# Altium PCB dipping.PcbDoc
Units mm, origin at the board's own origin, x right, y up, seen from the top; angles counter-clockwise.
Board outline 115 x 55.5 mm, 2 copper layers (Top Layer, Bottom Layer); 12 components, 20 nets, 188 pads, 4 vias.
Unrouted connection lines stored in the file: 13.
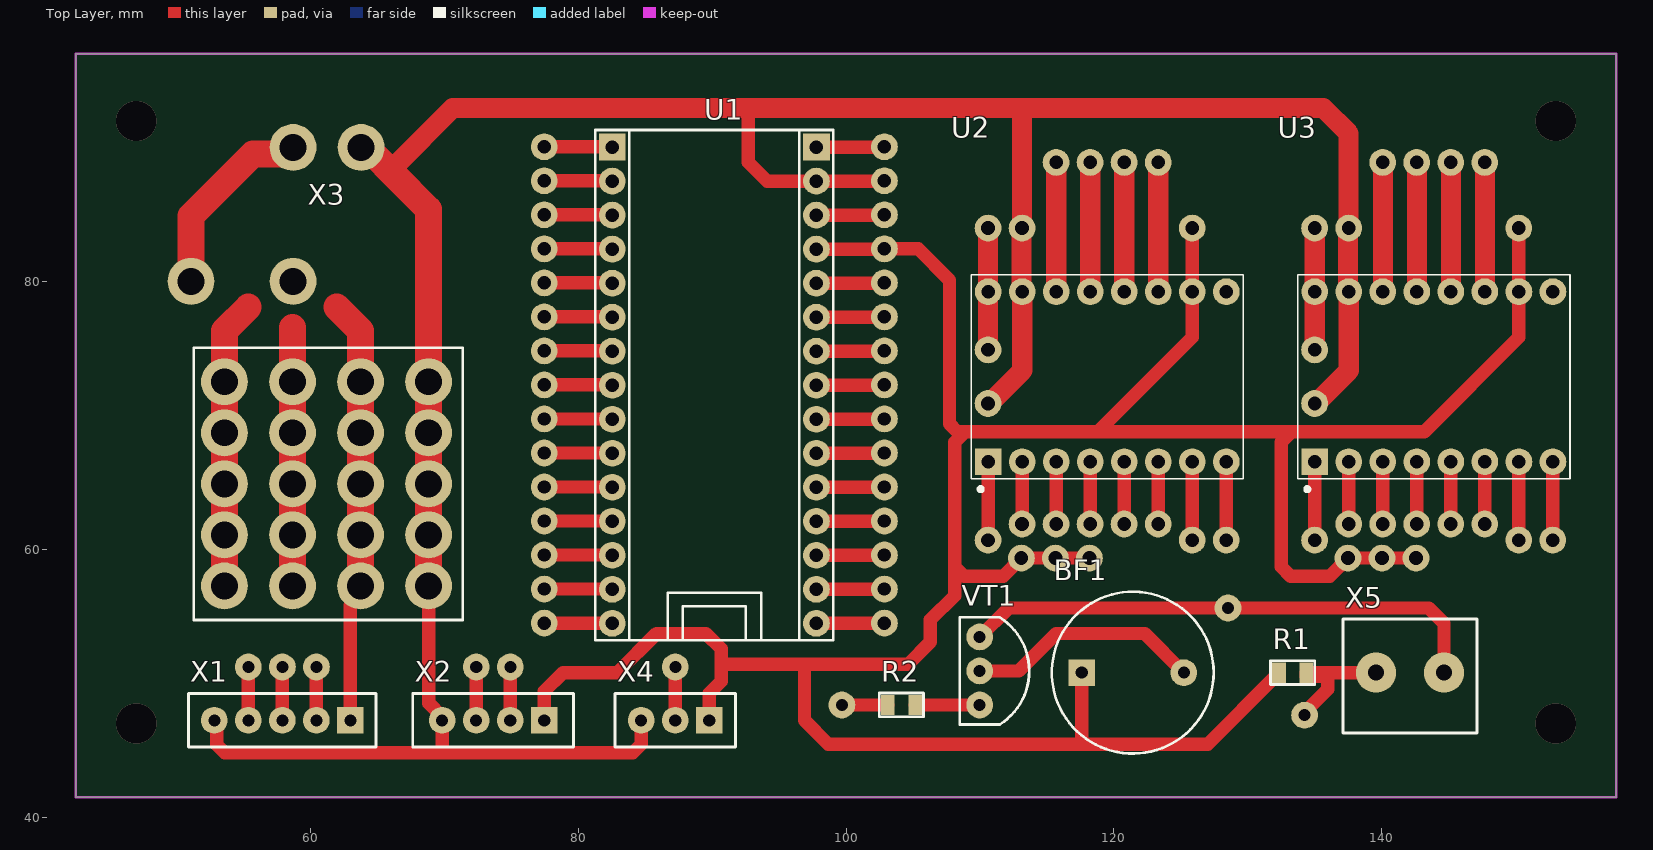
[diagram p0: Top Layer view]
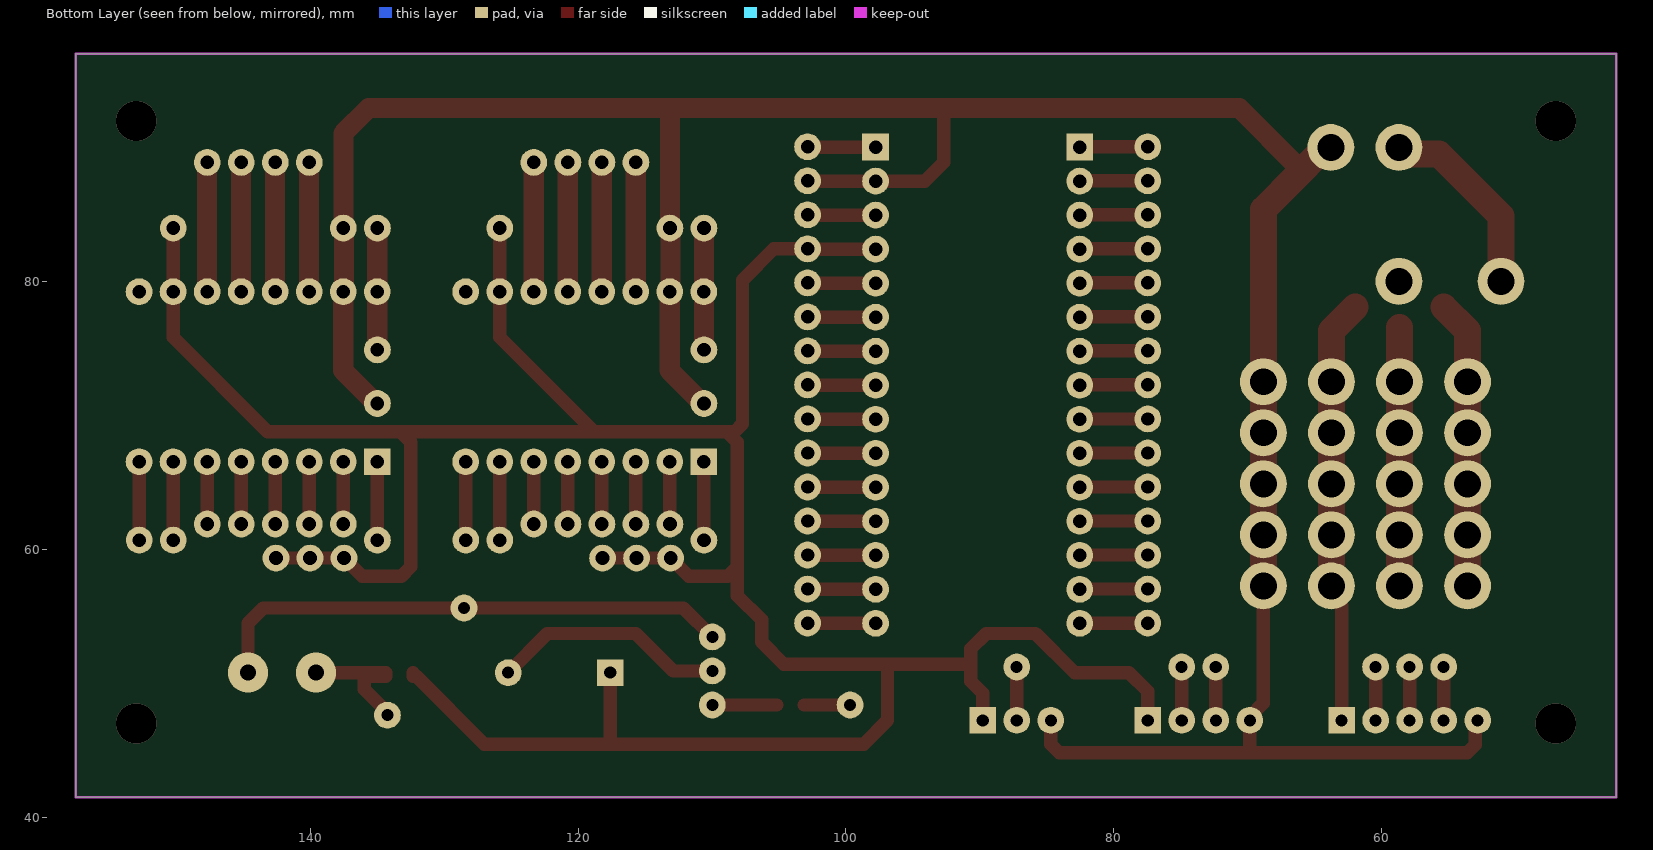
[diagram p1: Bottom Layer view, seen from below]

## Layer stack, top to bottom
Top Solder: solder mask 0.0102, Solder Resist, Dk 3.5
Top Layer: signal copper 0.0356
Dielectric 1: dielectric 0.32, FR-4, Dk 4.8
Bottom Layer: signal copper 0.0356
Bottom Solder: solder mask 0.0102, Solder Resist, Dk 3.5

## Board outline
42.5,41.5 157.5,41.5 157.5,97 42.5,97

## Design rules (kind name [scope] priority, off if disabled: settings)
Clearance [All] p1: gap=0.254 ignorepadtopadclearanceinfootprint=FALSE except(0: Arc-Hole Track-Hole SMDPad-Hole THPad-Hole Via-Hole Fill-Hole Poly-Hole Region-Hole Text-Hole)
PolygonConnect [All] p1: connectstyle=Relief reliefconductorwidth=0.254 reliefentries=4 polygonreliefangle="90 Angle" airgapwidth=0.254
RoutingVias [All] p1: holewidth=0.711 width=1.27 viastyle="Through Hole" minholewidth=0.711 minwidth=1.27 maxholewidth=0.711 maxwidth=1.27
SolderMaskExpansion [All] p1: expansion=0.102 istentingtop=FALSE
Width [All] p1: maxlimit=1.5 minlimit=0.3 preferedwidth=1
30 further rules are at their usual default settings.

## Components (designator, comment, footprint, x,y, rotation, side; value= is the part's Value field where it differs from the comment)
BF1 "Buzzer" BUZZER 121.412,50.8 r0 top
R1 "10k" SMD-0805-RES 133.35,50.8 r270 top
R2 "4.7k" SMD-0805-RES 104.14,48.387 r90 top
U1 "Arduino Nano" Arduino_Nano_Extended 90.17,72.263 r0 top
U2 "A4988" UNI_STEPPER_MOTOR_DRIVER_CARRIER#1 119.507,72.898 r90 top
U3 "A4988" UNI_STEPPER_MOTOR_DRIVER_CARRIER#2 143.891,72.898 r90 top
VT1 "KT315" TO92 109.982,50.927 r180 top
X1 "Encoder" X_5pins_simplified 57.912,47.244 r180 top
X2 "I2C Display" X_4pins_simplified 73.66,47.244 r180 top
X3 "Power bus" POWER_BUS 61.214,72.517 r0 top
X4 "Touch sensor" X_3pins_simplified 87.249,47.244 r180 top
X5 "Button" X_2pins_5mm 142.113,50.8 r0 top

## Footprints (in the part's own frame and the unit in brackets; to place one, negate y for a bottom-side part, rotate by r counter-clockwise, add the part's x,y. Pads: shape width x height; smd on the part's side, far side on the other; paste and mask are expansions set on the pad)
Arduino_Nano_Extended [mm]
  round 2 hole 1: 1(-12.7,17.8) 2(-12.7,15.26) 2(-7.62,15.24) 3(-12.7,12.72) 3(-7.62,12.7) 4(-12.7,10.18) 4(-7.62,10.16) 5(-12.7,7.64) 5(-7.62,7.62) 6(-12.7,5.1) 6(-7.62,5.08) 7(-12.7,2.56) 7(-7.62,2.54) 8(-12.7,0.02) 8(-7.62,0) 9(-12.7,-2.52) 9(-7.62,-2.54) 10(-12.7,-5.06) 10(-7.62,-5.08) 11(-12.7,-7.6) 11(-7.62,-7.62) 12(-12.7,-10.14) 12(-7.62,-10.16) 13(-12.7,-12.68) 13(-7.62,-12.7) 14(-12.7,-15.22) 14(-7.62,-15.24) 15(-12.7,-17.76) 15(-7.62,-17.78) 16(7.62,-17.78) 16(12.7,-17.76) 17(7.62,-15.24) 17(12.7,-15.22) 18(7.62,-12.7) 18(12.7,-12.68) 19(7.62,-10.16) 19(12.7,-10.14) 20(7.62,-7.62) 20(12.7,-7.6) 21(7.62,-5.08) 21(12.7,-5.06) 22(7.62,-2.54) 22(12.7,-2.52) 23(7.62,0) 23(12.7,0.02) 24(7.62,2.54) 24(12.7,2.56) 25(7.62,5.08) 25(12.7,5.1) 26(7.62,7.62) 26(12.7,7.64) 27(7.62,10.16) 27(12.7,10.18) 28(7.62,12.7) 28(12.7,12.72) 29(7.62,15.24) 29(12.7,15.26) 30(12.7,17.8)
  rect 2x2 hole 1: 1(-7.62,17.78) 30(7.62,17.78)
  Top Layer lines w1: -12.7,-17.76 -7.64,-17.76 ; -12.7,-15.22 -7.64,-15.22 ; -12.7,-12.68 -7.64,-12.68 ; -12.7,-10.14 -7.64,-10.14 ; -12.7,-7.6 -7.64,-7.6 ; -12.7,-5.06 -7.64,-5.06 ; -12.7,-2.52 -7.64,-2.52 ; -12.7,0.02 -7.64,0.02 ; -12.7,2.56 -7.64,2.56 ; -12.7,5.1 -7.64,5.1 ; -12.7,7.64 -7.64,7.64 ; -12.7,10.18 -7.64,10.18 ; -12.7,12.72 -7.64,12.72 ; -12.7,15.26 -7.64,15.26 ; -12.7,17.8 -7.64,17.8 ; 7.62,-17.78 12.68,-17.78 ; 7.62,-15.24 12.68,-15.24 ; 7.62,-12.7 12.68,-12.7 ; 7.62,-10.16 12.68,-10.16 ; 7.62,-7.62 12.68,-7.62 ; 7.62,-5.08 12.68,-5.08 ; 7.62,-2.54 12.68,-2.54 ; 7.62,0 12.68,0 ; 7.62,2.54 12.68,2.54 ; 7.62,5.08 12.68,5.08 ; 7.62,7.62 12.68,7.62 ; 7.62,10.16 12.68,10.16 ; 7.62,12.7 12.68,12.7 ; 7.62,15.24 12.68,15.24 ; 7.62,17.78 12.68,17.78
  silkscreen extent -8.89,-19.05 8.89,19.05
BUZZER [mm]
  rect 2x2 hole 0.9: 1(-3.81,0)
  round 2 hole 0.9: 2(3.81,0)
  silkscreen extent -6.04,-6.04 6.04,6.04
POWER_BUS [mm]
  round 3.5 hole 2: 1(-7.62,-15.24) 1(-7.62,-11.43) 1(-7.62,-7.62) 1(-7.62,-3.81) 1(-7.62,0) 2(-2.54,-15.24) 2(-2.54,-11.43) 2(-2.54,-7.62) 2(-2.54,-3.81) 2(-2.54,0) 3(2.54,-15.24) 3(2.54,-11.43) 3(2.54,-7.62) 3(2.54,-3.81) 3(2.54,0) 4(7.62,-15.24) 4(7.62,-11.43) 4(7.62,-7.62) 4(7.62,-3.81) 4(7.62,0) ""(-10.12,7.5) ""(-2.5,7.5) ""(-2.5,17.5) ""(2.58,17.5)
  Top Layer lines w2: -10.12,7.5 -10.12,12.38 -5.5,17 -2.5,17 ; -7.62,-15.24 -7.62,0 -7.62,3.81 -5.842,5.588 ; -2.54,-15.24 -2.54,0 -2.54,4.064 ; 0.762,5.588 2.54,3.81 2.54,0 2.54,-3.81 2.54,-7.62 2.54,-11.43 2.54,-15.24 ; 2.54,17 3.5,17 5.043,15.457 7.62,12.88 7.62,0 7.62,-3.81 7.62,-7.62 7.62,-11.43 7.62,-15.24
  silkscreen extent -9.91,-17.78 10.16,2.54
SMD-0805-RES [mil]
  rect 60x40 smd: 1(0,40) 2(0,-40)
  silkscreen extent -35,-65 35,65, body extent -24,-39 26,39, height 31
TO92 [mm] "TO, Flat Index; 3 In-Line,"
  round 2 hole 0.9: 1(0,2.54) 2(0,0) 3(0,-2.54)
  silkscreen extent -3.7,-4 1.5,4
UNI_STEPPER_MOTOR_DRIVER_CARRIER#1 [mm]
  round 2 hole 1.02: 1(-12.2,8.9) 2(-13.54,6.41) 2(-11,6.36) 2(-6.35,6.35) 3(-13.54,3.87) 3(-11,3.82) 3(-6.35,3.81) 4(-13.54,1.33) 4(-11,1.28) 4(-6.35,1.27) 5(-11,-1.26) 5(-6.35,-1.27) 6(-11,-3.8) 6(-6.35,-3.81) 7(-12.2,-6.34) 7(-6.35,-6.35) 8(-12.2,-8.88) 8(-6.35,-8.89) 9(6.35,-8.89) 10(6.35,-6.35) 10(11.1,-6.34) 11(6.35,-3.81) 11(16,-3.8) 12(6.35,-1.27) 12(16,-1.26) 13(6.35,1.27) 13(16,1.28) 14(6.35,3.81) 14(16,3.82) 15(-2,8.9) 15(6.35,6.35) 15(11.1,6.36) 16(2,8.9) 16(6.35,8.89) 16(11.1,8.9)
  rect 2x2 hole 1.02: 1(-6.35,8.89)
  Top Layer lines w1: -12.2,8.89 -6.35,8.89 ; -10.99,6.35 -6.35,6.35 ; -10.99,3.81 -6.35,3.81 ; -13.54,1.33 -13.54,6.41 -14.9,7.77 -14.9,10.7 -14.2,11.4 -5.461,11.4 -4.9,11.4 -4.396,10.896 -4.1,10.6 -4.1,9.525 -4.1,0.7 2.95,-6.35 6.35,-6.35 11.1,-6.35 ; -10.99,1.27 -6.35,1.27 ; -10.99,-1.27 -6.35,-1.27 ; -10.99,-3.81 -6.35,-3.81 ; -12.2,-6.35 -6.35,-6.35 ; -12.2,-8.89 -6.35,-8.89
  Top Layer lines w1.5: 2,8.89 6.35,8.89 11.1,8.89 ; -2.05,8.85 0.45,6.35 6.35,6.35 ; 6.299,6.409 6.35,6.409 11.049,6.409 ; 6.35,3.81 15.99,3.81 ; 6.35,1.27 15.99,1.27 ; 6.35,-1.27 15.99,-1.27 ; 6.35,-3.81 15.99,-3.81
  silkscreen extent -8.5,-10.16 7.62,10.16, body extent -7.62,-10.16 7.62,10.16, height 13.44
UNI_STEPPER_MOTOR_DRIVER_CARRIER#2 [mm]
  round 2 hole 1.02: 1(-12.2,8.9) 2(-13.54,6.41) 2(-11,6.36) 2(-6.35,6.35) 3(-13.54,3.87) 3(-11,3.82) 3(-6.35,3.81) 4(-13.54,1.33) 4(-11,1.28) 4(-6.35,1.27) 5(-11,-1.26) 5(-6.35,-1.27) 6(-11,-3.8) 6(-6.35,-3.81) 7(-12.2,-6.34) 7(-6.35,-6.35) 8(-12.2,-8.88) 8(-6.35,-8.89) 9(6.35,-8.89) 10(6.35,-6.35) 10(11.1,-6.34) 11(6.35,-3.81) 11(16,-3.8) 12(6.35,-1.27) 12(16,-1.26) 13(6.35,1.27) 13(16,1.28) 14(6.35,3.81) 14(16,3.82) 15(-2,8.9) 15(6.35,6.35) 15(11.1,6.36) 16(2,8.9) 16(6.35,8.89) 16(11.1,8.9)
  rect 2x2 hole 1.02: 1(-6.35,8.89)
  Top Layer lines w1: -12.2,8.89 -6.35,8.89 ; -10.99,6.35 -6.35,6.35 ; -10.99,3.81 -6.35,3.81 ; -13.54,1.33 -13.54,6.41 -14.9,7.77 -14.9,10.7 -14.2,11.4 -4.9,11.4 -4.1,10.6 -4.1,0.7 2.95,-6.35 6.35,-6.35 11.1,-6.35 ; -10.99,1.27 -6.35,1.27 ; -10.99,-1.27 -6.35,-1.27 ; -10.99,-3.81 -6.35,-3.81 ; -12.2,-6.35 -6.35,-6.35 ; -12.2,-8.89 -6.35,-8.89
  Top Layer lines w1.5: 2,8.89 6.35,8.89 11.1,8.89 ; -2.05,8.85 0.45,6.35 6.35,6.35 ; 6.299,6.409 6.35,6.409 11.049,6.409 ; 6.35,3.81 15.99,3.81 ; 6.35,1.27 15.99,1.27 ; 6.35,-1.27 15.99,-1.27 ; 6.35,-3.81 15.99,-3.81
  silkscreen extent -8.5,-10.16 7.62,10.16, body extent -7.62,-10.16 7.62,10.16, height 13.44
X_2pins_5mm [mm]
  round 3 hole 1.2: 1(-2.54,0) 2(2.54,0)
  silkscreen extent -5,-4.5 5,4
X_3pins_simplified [mm]
  rect 2x2 hole 0.9: 1(-2.54,0)
  round 2 hole 0.9: 2(0,0) 3(2.54,0)
  silkscreen extent -4.5,-2 4.5,2
X_4pins_simplified [mm]
  rect 2x2 hole 0.9: 1(-3.81,0)
  round 2 hole 0.9: 2(-1.27,0) 3(1.27,0) 4(3.81,0)
  silkscreen extent -6,-2 6,2
X_5pins_simplified [mm]
  rect 2x2 hole 0.9: 1(-5.08,0)
  round 2 hole 0.9: 2(-2.54,0) 3(0,0) 4(2.54,0) 5(5.08,0)
  silkscreen extent -7,-2 7,2

## Part data
BF1: library part BF_BUZZER
R1 R2: library part ERJ-P06J222V, "RES SMD 2.2K OHM 5% 1/2W 0805", Digi-Key Part Number=P2.2KADCT-ND, Manufacturer="Panasonic Electronic Components", Operating Temperature="-55°C ~ 155°C", Package / Case="0805 (2012 Metric)", Power (Watts)="0.5W, 1/2W", Supplier Device Package=0805, Temperature Coefficient=±200ppm/°C, Tolerance=±5%, @ qty=1500, Composition="Thick Film", Datasheets=https://industrial.panasonic.com/cdbs/www-data/pdf/RDA0000/AOA0000C243.pdf, Factory Stock=0, Failure Rate=-, Features="Automotive AEC-Q200, Pulse Withstanding", Height - Seated (Max)="0.028\" (0.70mm)", Image=//media.digikey.com/Renders/Panasonic%20Renders/ERJ-0805%20Pkg.jpg, Minimum Quantity=1, Number of Terminations=2, Packaging="Cut Tape (CT)", Part Number=ERJ-P06J222V, Part Status=Active, Quantity Available=53050, Series=ERJ, Size / Dimension="0.079\" L x 0.049\" W (2.00mm x 1.25mm)", Unit Price (USD)=0.01839
U1: library part Arduino_Nano
U2 U3: library part A4988_STEPPER_MOTOR_DRIVER_CARRIER, "Stepper Motor Driver", Package=None, Availability=Unavailable, MF=Pololu, MP="A4988 STEPPER MOTOR DRIVER CARRIER", Price=None, SnapEDA_Link=https://www.snapeda.com/parts/A4988%20STEPPER%20MOTOR%20DRIVER%20CARRIER/Pololu/view-part/1499394/?ref=snap
X1: library part Connector_5pins, Type=Encoder
X2: library part Connector_4pins, Type="I2C Display"
X3: library part POWER_BUS, Type="Power bus"
X4: library part Connector_3pins, Type="Touch sensor"
X5: library part Connector_2pins, Type=Button
VT1: Type=KT315

## Free pads (board coordinates)
  round 2 hole 0.9: 4(55.376,51.223) 4(57.916,51.223) 4(60.456,51.223) 4(72.394,51.223) 4(74.934,51.223) 4(87.253,51.223) 5(134.239,47.625) 7(99.695,48.387) 8(128.524,55.626)

## Via types
v1: diameter 3, hole 3, Top Layer to Bottom Layer, 4 vias

## Nets (pads, with @x,y where several pads share a name; then routed paths per layer and width w, separated by ;. In a path a pad name is that pad's centre, name@x,y a point inside that pad or via, vN(x,y) a via of type N, cw(c..) or ccw(c..) an arc to the next point about the centre after c; other vN are vias at no path point)
5V: BF1.1 R1.2 U1.27 U2.10 U3.10 X1.1 X2.1 X3.3 X4.1 | length 136.9
  Top Layer w1: X1.1 62.992,55.839 63.754,56.601 X3.3@63.754,57.277 ; X2.1 77.47,49.403 78.867,50.8 82.931,50.8 85.852,53.721 89.535,53.721 90.678,52.578 90.678,51.435 ; X4.1 89.789,49.276 90.678,50.165 90.678,51.435 ; U1.27@102.87,82.443 105.39,82.443 107.73,80.103 107.73,69.384 108.316,68.798 108.907,68.798 ; 108.107,58.698 108.107,56.545 106.299,54.737 106.299,53.086 104.648,51.435 96.901,51.435 ; BF1.1 117.602,45.466 ; 118.807,68.798 133.291,68.798 ; R1.2 132.334,50.546 132.326,50.538 132.072,50.538 127,45.466 117.602,45.466 ; 90.678,51.435 96.901,51.435 ; 96.901,51.435 96.901,47.244 98.679,45.466 117.602,45.466
12V: X3.2
24V: X3.1
GND: pad.8 U1.4 U1.29 U2.9 U2.15 U3.9 U3.15 VT1.3 X1.5 X2.4 X3.4 X4.3 X5.2 | length 189
  Top Layer w1: X1.5@52.832,47.498 X1.5 53.023,47.053 53.023,45.417 53.609,44.831 69.85,44.831 ; X3.4@68.834,57.277 68.834,48.531 69.85,47.515 X2.4 69.85,44.831 ; X4.3 84.709,45.466 84.074,44.831 69.85,44.831 ; 92.71,92.964 92.71,88.9 94.107,87.503 U1.29@97.79,87.503 ; VT1.3 112.141,55.626 143.51,55.626 144.653,54.483 X5.2
  Top Layer w1.5: 66.257,87.974 66.257,88.585 70.636,92.964 92.71,92.964 113.147,92.964 ; U2.15@113.147,83.998 113.147,92.964 ; U3.15@137.531,83.998 137.531,91.069 135.636,92.964 113.147,92.964
NetBF1_2: BF1.2 VT1.2 | length 17.6
  Top Layer w1: VT1.2 112.903,50.927 115.697,53.721 122.301,53.721 BF1.2
NetR1_1: pad.5 R1.1 U1.7 X5.1 | length 10.7
  Top Layer w1: pad.5 134.366,47.958 135.963,49.555 135.963,50.538 134.374,50.538 134.366,50.546 R1.1 135.963,50.8 X5.1
NetR2_1: pad.7 R2.1 U1.15 | length 3.4
  Top Layer w1: pad.7 R2.1
NetR2_2: R2.2 VT1.1 | length 4.8
  Top Layer w1: R2.2 VT1.1
NetU1_10: pad.4@87.253,51.223 U1.10 X4.2 | length 4
  Top Layer w1: X4.2 pad.4@87.249,51.219
NetU1_20: pad.4@55.376,51.223 U1.20 X1.4 | length 4
  Top Layer w1: X1.4 pad.4@55.372,51.219
NetU1_21: pad.4@57.916,51.223 U1.21 X1.3 | length 4
  Top Layer w1: X1.3 pad.4@57.912,51.219
NetU1_22: pad.4@60.456,51.223 U1.22 X1.2 | length 4
  Top Layer w1: X1.2 pad.4@60.452,51.219
NetU1_23: pad.4@72.394,51.223 U1.23 X2.3 | length 4
  Top Layer w1: X2.3 pad.4@72.39,51.219
NetU1_24: pad.4@74.934,51.223 U1.24 X2.2 | length 4
  Top Layer w1: X2.2 pad.4@74.93,51.219
NetU2_1: U2.1
NetU2_7: U2.7
NetU2_8: U2.8
NetU3_1: U3.1
NetU3_7: U3.7
NetU3_8: U3.8
pads on no net: U1.1 U1.2 U1.3 U1.5 U1.6 U1.8 U1.9 U1.11 U1.12 U1.13 U1.14 U1.16 U1.17 U1.18 U1.19 U1.25 U1.26 U1.28 U1.30 U2.2 U2.3 U2.4 U2.5 U2.6 U2.11 U2.12 U2.13 U2.14 U2.16 U3.2 U3.3 U3.4 U3.5 U3.6 U3.11 U3.12 U3.13 U3.14 U3.16 X3.
copper on no net:
  other v1: 47,47 153,47 47,92 153,92

## Keep-outs
Keep-Out Layer:
  the board outline again, w0.2